# EAGLE board v0.6 (EAGLE 9.3.2)
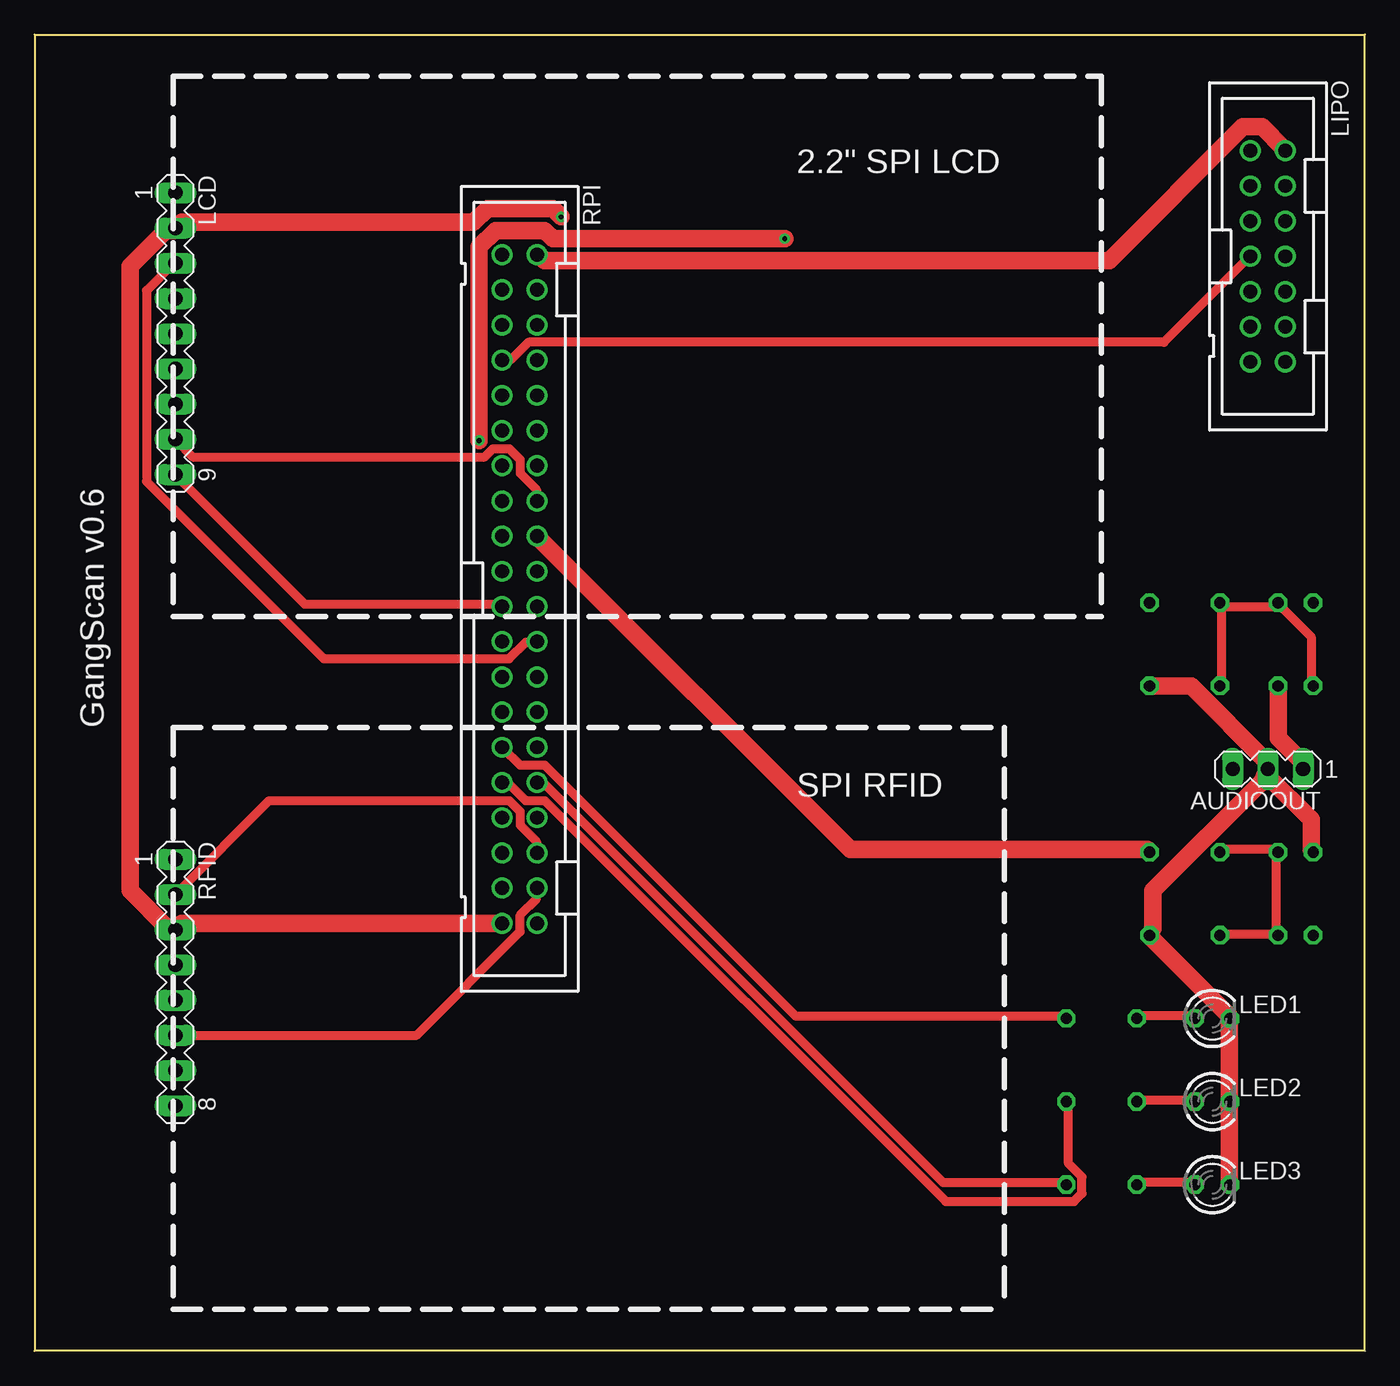
[diagram p0: board, top side]
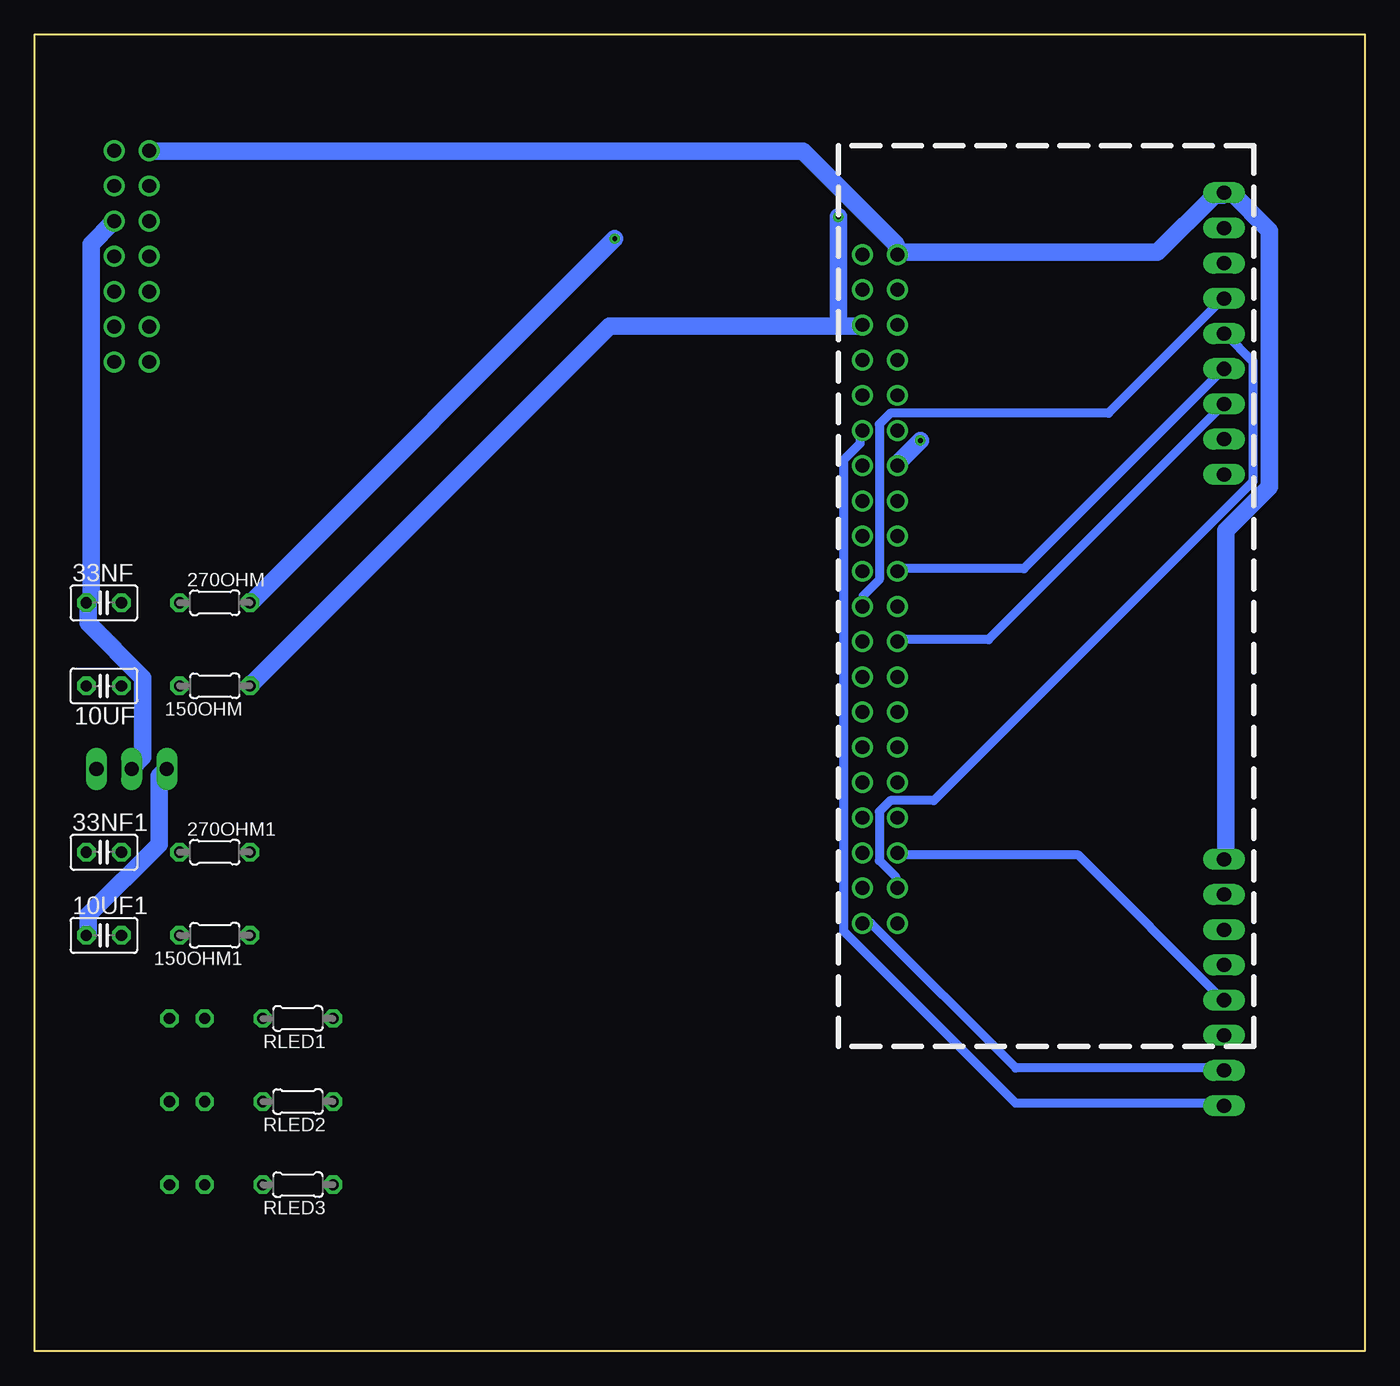
[diagram p1: board, bottom side, seen from below]

Size 96 x 95 mm. Coordinates in mm from the lower left corner, seen from the top.
Outline: 0,95 96,95 96,0 0,0 0,95
Copper layers (1*16): Top 0.035mm / dielectric 1.5mm / Bottom 0.035mm
Design rules "default": minimum track width 6mil, minimum drill 0.35mm, track to track 6mil, track to pad 6mil, pad to pad 6mil, via to via 6mil, smd to smd 6mil, copper to edge 40mil, drill to drill 6mil, minimum pad ring 10mil, minimum via ring 8mil, stop-mask expansion 4mil, vias tented up to drill 0mil, thermal gap 10mil
Net classes: 0 default: width 0.635 mm; 1 ground: width 1.27 mm; 2 vcc: width 1.27 mm; 3 audio: width 1.27 mm

## Footprints (pad centres in the part's own frame; a part is rotated, then mirrored left to right if it is on the bottom)
C025-025X050 = drill 0.813 octagon: 1 -1.27,0; 2 1.27,0
0204/5 = drill 0.813 octagon: 1 -2.54,0; 2 2.54,0
MA03-1 = drill 1.016 long: 1 -2.54,0; 2 0,0; 3 2.54,0
MA09-1 = drill 1.016 long: 1 -10.16,0; 2 -7.62,0; 3 -5.08,0; 4 -2.54,0; 5 0,0; 6 2.54,0; 7 5.08,0; 8 7.62,0; 9 10.16,0
LED3MM = drill 0.813 octagon: A -1.27,0; K 1.27,0
PAK100/2500-14 = drill 1 pad 1.422: 1 -7.62,-1.27; 2 -7.62,1.27; 3 -5.08,-1.27; 4 -5.08,1.27; 5 -2.54,-1.27; 6 -2.54,1.27; 7 0,-1.27; 8 0,1.27; 9 2.54,-1.27; 10 2.54,1.27; 11 5.08,-1.27; 12 5.08,1.27; 13 7.62,-1.27; 14 7.62,1.27
MA08-1 = drill 1.016 long: 1 -8.89,0; 2 -6.35,0; 3 -3.81,0; 4 -1.27,0; 5 1.27,0; 6 3.81,0; 7 6.35,0; 8 8.89,0
PAK100/2500-40 = drill 1 pad 1.422: 1 -24.13,-1.27; 2 -24.13,1.27; 3 -21.59,-1.27; 4 -21.59,1.27; 5 -19.05,-1.27; 6 -19.05,1.27; 7 -16.51,-1.27; 8 -16.51,1.27; 9 -13.97,-1.27; 10 -13.97,1.27; 11 -11.43,-1.27; 12 -11.43,1.27; 13 -8.89,-1.27; 14 -8.89,1.27; 15 -6.35,-1.27; 16 -6.35,1.27; 17 -3.81,-1.27; 18 -3.81,1.27; 19 -1.27,-1.27; 20 -1.27,1.27; 21 1.27,-1.27; 22 1.27,1.27; 23 3.81,-1.27; 24 3.81,1.27; 25 6.35,-1.27; 26 6.35,1.27; 27 8.89,-1.27; 28 8.89,1.27; 29 11.43,-1.27; 30 11.43,1.27; 31 13.97,-1.27; 32 13.97,1.27; 33 16.51,-1.27; 34 16.51,1.27; 35 19.05,-1.27; 36 19.05,1.27; 37 21.59,-1.27; 38 21.59,1.27; 39 24.13,-1.27; 40 24.13,1.27

## Placement (x,y rotation side)
10UF  [C025-025X050]  91,48 180 bottom
10UF1  [C025-025X050]  91,30 0 bottom
33NF  [C025-025X050]  91,54 0 bottom
33NF1  [C025-025X050]  91,36 0 bottom
150OHM  [0204/5]  83,48 180 bottom
150OHM1  [0204/5]  83,30 180 bottom
270OHM  [0204/5]  83,54 0 bottom
270OHM1  [0204/5]  83,36 0 bottom
AUDIOOUT  [MA03-1]  89,42 180 top
LCD  [MA09-1]  10.16,73.42 270 top
LED1  [LED3MM]  85,24 0 top
LED2  [LED3MM]  85,18 0 top
LED3  [LED3MM]  85,12 0 top
LIPO  2514-  [PAK100/2500-14]  89,79 270 top
RFID  [MA08-1]  10.16,26.59 270 top
RLED1  [0204/5]  77,24 180 bottom
RLED2  [0204/5]  77,18 180 bottom
RLED3  [0204/5]  77,12 180 bottom
RPI  2540-  [PAK100/2500-40]  35,55 270 top

## Library data of the parts
10UF 10UF1 33NF 33NF1 = rcl; SPICEPREFIX: C
150OHM 150OHM1 270OHM 270OHM1 RLED1-RLED3 = rcl; SPICEPREFIX: R
AUDIOOUT LCD RFID = con-lstb; OC_FARNELL: unknown; OC_NEWARK: unknown
LED1-LED3 = led
LIPO RPI = con-3m; OC_FARNELL: unknown; OC_NEWARK: unknown

## Nets
3.3V [vcc]: LCD.1 LIPO.1 RFID.1 RPI.1
5V [vcc]: LIPO.2 RPI.2
AUDIO1 [audio]: 270OHM.2 RPI.13
AUDIO2 [audio]: 270OHM1.2 RPI.18
GND [ground]: 33NF1.1 33NF.1 150OHM1.1 150OHM.1 AUDIOOUT.2 LCD.2 LED1.K LED2.K LED3.K LIPO.6 RFID.3 RPI.6 RPI.39
LCD_DCRS: LCD.5 RPI.37
LCD_LED: LCD.8 RPI.16
LCD_RESET: LCD.4 RPI.22
LOWBAT: LIPO.7 RPI.7
N$1: 10UF.2 33NF.2 150OHM.2 270OHM.1
N$2: LED2.A RLED2.2
N$3: LED3.A RLED3.2
N$4: RLED1.1 RPI.29
N$5: RLED2.1 RPI.31
N$6: RLED3.1 RPI.32
N$7: 10UF1.2 33NF1.2 150OHM1.2 270OHM1.1
N$8 [audio]: 10UF.1 AUDIOOUT.1
N$9 [audio]: 10UF1.1 AUDIOOUT.3
N$11: LED1.A RLED1.2
RFID_RESET: RFID.2 RPI.36
SPI0_CS0: LCD.3 RPI.24
SPI0_MISO: LCD.9 RPI.21
SPI0_MOSI: LCD.6 RPI.19
SPI0_SCK: LCD.7 RPI.23
SPI1_CS0: RFID.8 RPI.12
SPI1_MISO: RFID.5 RPI.35
SPI1_MOSI: RFID.6 RPI.38
SPI1_SCK: RFID.7 RPI.40

## Tracks (layer width: path | path; a pad name or v marks a point on that pad's centre or on a via)
3.3V
  Bottom 1.27: LIPO.1 87.6,86.58 40.55,86.58 33.86,79.88 RPI.1 33.66,79.29 14.96,79.29 10.83,83.42 10.24,83.42 LCD.1 9.65,83.62 6.89,80.87 6.89,62.36 10.04,59.21 10.04,35.59 RFID.1
5V
  Top 1.27: RPI.2 36.42,79.09 36.81,78.7 77.56,78.7 87.2,88.35 88.58,88.35 90.16,86.77 LIPO.2
AUDIO1  (via drill 0.35)
  Top 1.27: v54.13,80.28 37.4,80.28 36.81,80.87 33.27,80.87 32.09,79.69 v32.09,65.71
  Bottom 1.27: v54.13,80.28 80.31,54.09 270OHM.2 | v32.09,65.71 33.86,63.94 RPI.13
AUDIO2
  Top 1.27: 270OHM1.2 80.31,36.18 58.86,36.18 36.42,58.62 RPI.18
GND  (via drill 0.35)
  Top 1.27: RPI.39 33.66,30.87 10.63,30.87 10.24,30.47 RFID.3 9.65,30.47 6.89,33.23 6.89,78.31 9.45,80.87 10.04,80.87 LCD.2 10.63,81.46 31.69,81.46 32.68,82.44 37.4,82.44 v37.99,81.85 | LED3.K 86.22,12.16 86.22,17.87 LED2.K 86.22,18.46 86.22,23.39 LED1.K 86.22,24.17 80.51,29.88 150OHM1.1 80.71,30.47 80.71,33.23 88.58,41.1 AUDIOOUT.2 | 150OHM.1 80.51,47.99 83.46,47.99 88.98,42.48 88.98,42.09 AUDIOOUT.2 | 33NF1.1 92.13,36.18 92.13,38.35 88.98,41.5 AUDIOOUT.2
  Bottom 1.27: AUDIOOUT.2 88.98,42.09 88.19,42.87 88.19,48.58 92.13,52.52 92.13,53.9 33NF.1 91.93,54.49 91.93,79.88 90.35,81.46 LIPO.6 | 37.99,73.98 54.53,73.98 80.31,48.19 150OHM.1 | 37.99,73.98 36.42,73.98 RPI.6 | 37.99,73.98 v37.99,81.85
LCD_DCRS
  Bottom 0.635: RPI.37 33.86,33.42 33.86,34.21 35.04,35.39 35.04,38.94 34.25,39.72 31.1,39.72 8.07,62.76 8.07,71.42 10.04,73.39 LCD.5
LCD_LED
  Top 0.635: RPI.16 36.22,61.38 36.22,62.16 35.04,63.35 35.04,64.33 34.25,65.12 33.07,65.12 32.48,64.53 11.42,64.53 10.24,65.71 LCD.8
LCD_RESET
  Bottom 0.635: RPI.22 36.22,53.9 36.22,54.49 35.04,55.67 35.04,66.89 34.25,67.68 18.5,67.68 10.24,75.94 LCD.4
LOWBAT
  Top 0.635: RPI.7 33.86,71.61 34.45,71.61 35.63,72.8 81.5,72.8 87.6,78.9 LIPO.7
N$1
  Top 0.635: 150OHM.2 85.63,48.19 85.63,53.9 270OHM.1 85.83,53.7 89.57,53.7 33NF.2 89.76,53.9 92.13,51.53 92.13,48.19 10UF.2
N$2
  Top 0.635: RLED2.2 79.72,18.07 83.66,18.07 LED2.A
N$3
  Top 0.635: RLED3.2 79.72,12.16 83.66,12.16 LED3.A
N$4
  Top 0.635: RLED1.1 74.41,24.17 54.92,24.17 36.81,42.28 35.04,42.28 33.86,43.47 RPI.29
N$5
  Top 0.635: RLED2.1 74.61,17.87 74.61,13.54 75.59,12.56 75.59,11.38 75,10.79 65.75,10.79 36.81,39.72 35.43,39.72 34.25,40.91 33.86,40.91 RPI.31
N$6
  Top 0.635: RLED3.1 74.41,12.16 65.55,12.16 36.81,40.91 36.42,40.91 RPI.32
N$7
  Top 0.635: 150OHM1.2 85.63,30.08 89.57,30.08 10UF1.2 89.57,30.28 89.57,35.79 33NF1.2 89.57,36.18 85.63,36.18 270OHM1.1
N$8
  Top 1.27: 10UF.1 89.76,47.99 89.76,44.25 91.53,42.48 91.53,42.09 AUDIOOUT.1
N$9
  Bottom 1.27: 10UF1.1 92.13,30.08 92.13,31.46 87.01,36.58 87.01,41.5 86.61,41.89 AUDIOOUT.3
N$11
  Top 0.635: RLED1.2 79.72,24.17 83.66,24.17 LED1.A
RFID_RESET
  Top 0.635: RPI.36 36.22,35.98 36.22,36.77 35.04,37.95 35.04,38.94 34.25,39.72 16.93,39.72 10.24,33.03 RFID.2
SPI0_CS0
  Top 0.635: RPI.24 36.22,51.14 35.43,51.14 34.25,49.96 20.87,49.96 8.07,62.76 8.07,76.53 10.04,78.5 LCD.3
SPI0_MISO
  Top 0.635: RPI.21 33.66,53.9 19.49,53.9 10.24,63.15 LCD.9
SPI0_MOSI
  Bottom 0.635: RPI.19 33.66,56.46 24.61,56.46 10.24,70.83 LCD.6
SPI0_SCK
  Bottom 0.635: RPI.23 33.66,51.34 27.16,51.34 10.24,68.27 LCD.7
SPI1_CS0
  Bottom 0.635: RPI.12 36.42,66.3 36.42,65.51 37.6,64.33 37.6,30.28 25.2,17.87 10.24,17.87 RFID.8
SPI1_MISO
  Bottom 0.635: RPI.35 33.66,35.79 20.67,35.79 10.24,25.35 RFID.5
SPI1_MOSI
  Top 0.635: RPI.38 36.22,33.23 36.22,32.64 35.04,31.46 35.04,30.28 27.56,22.8 10.24,22.8 RFID.6
SPI1_SCK
  Bottom 0.635: RPI.40 36.22,30.87 35.63,30.87 25.2,20.43 10.24,20.43 RFID.7

## Text on the board
tPlace: 2.2" SPI LCD | GangScan v0.6 | SPI RFID